# Altium PCB PCB1.PcbDoc (part 2 of 2)
Units mm, origin at the board's own origin, x right, y up, seen from the top; angles counter-clockwise.
Board outline 69.6 x 55 mm, 4 copper layers (Top Layer 1, Top Layer, Bottom Layer, Bottom Layer 1), stack 0.534 mm thick; 132 components, 100 nets, 446 pads, 41 vias.
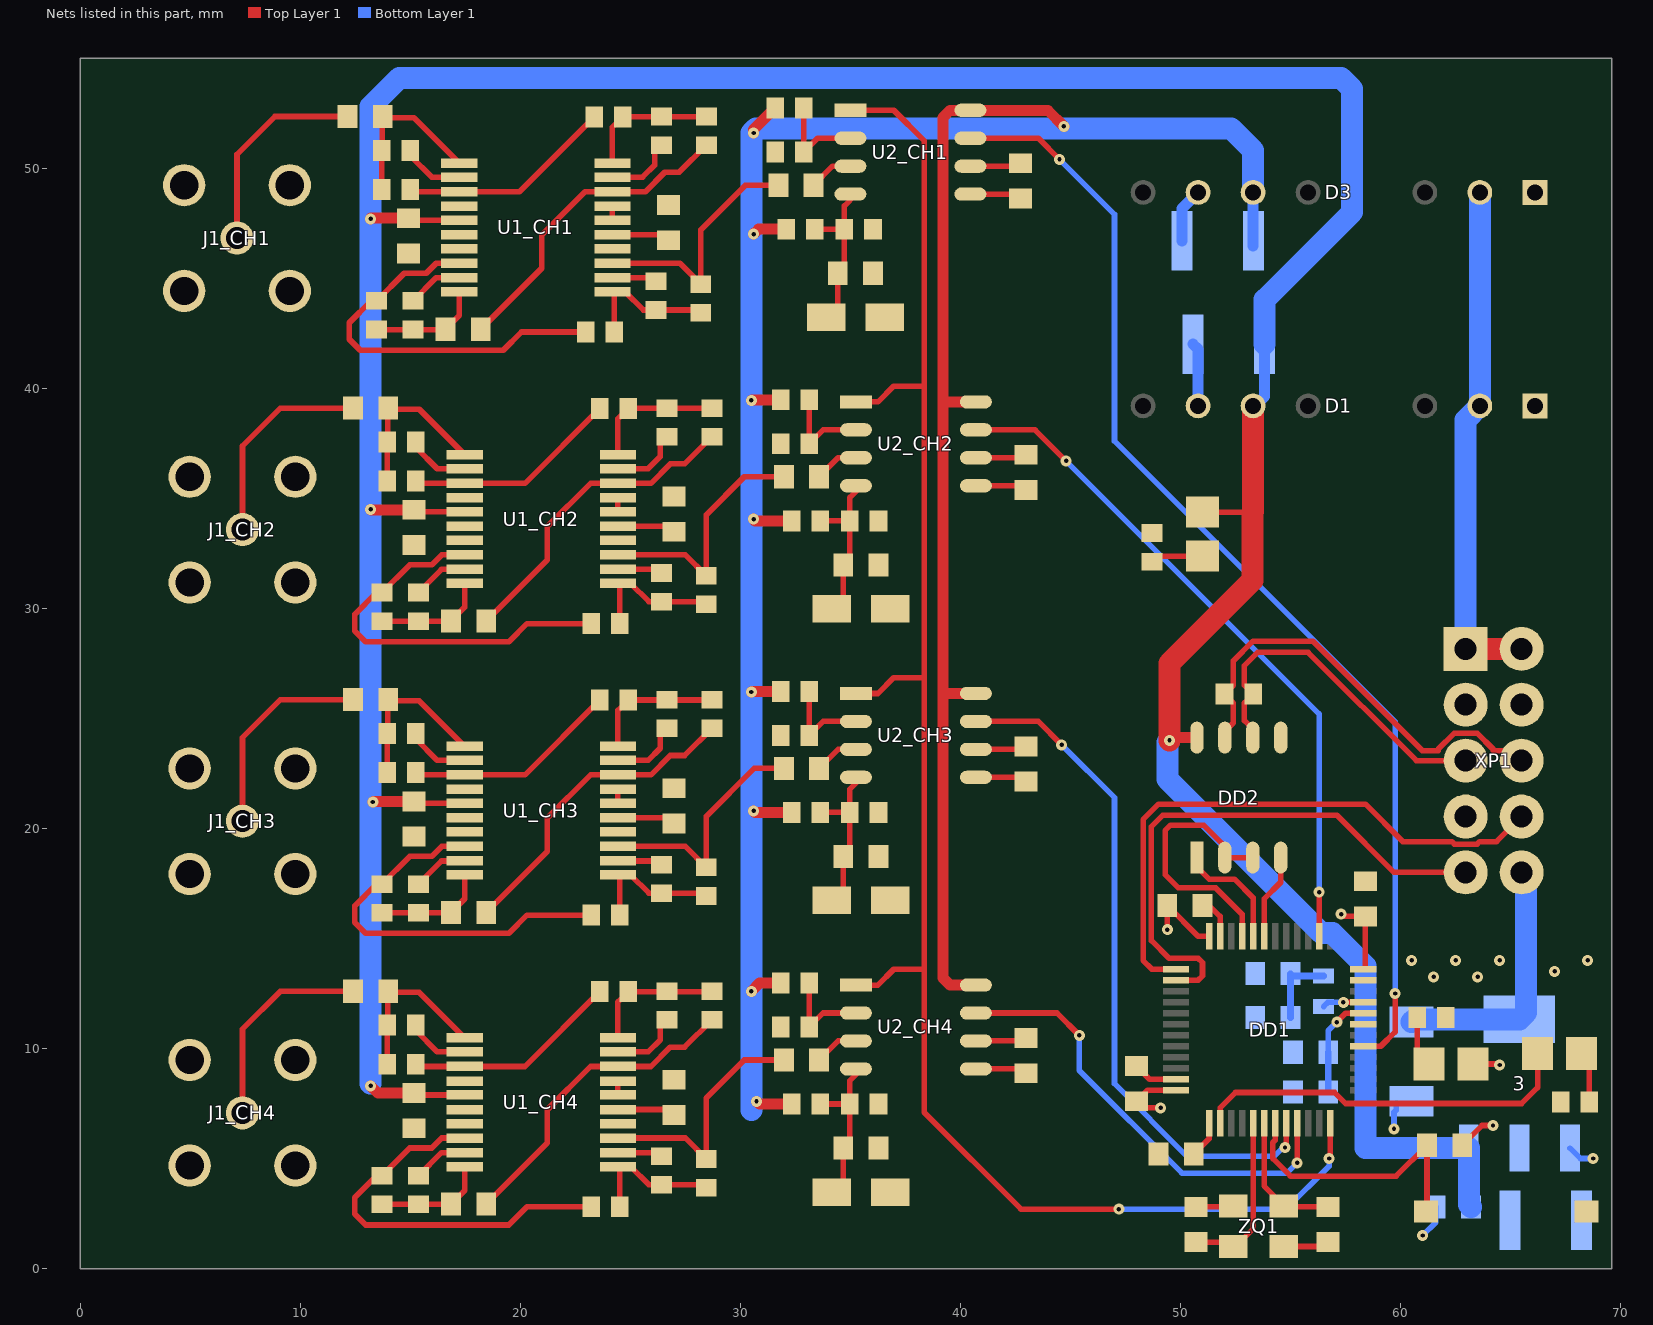
[diagram p4: the nets of this part, all layers, seen from the top]

## Part data
3: "Линейный стабилизатор напряжения", Part Number=LD1117S33CTR
C1_CH1 C1_CH2 C1_CH3 C1_CH4 C2_CH1 C2_CH2 C2_CH3 C2_CH4 C8_CH1 C8_CH2 C8_CH3 C8_CH4: library part Capacitor_1n_10_50V_X7R_0603C, "Конденсатор 0603C ёмкостью 1 н 10%, 50 В, X7R", Capacity (nF)=1, Dielectric=X7R, Tolerance=10%, Voltage (V)=50, Part Number=Capacitor_1n_10_50V_X7R_0603C
C3_CH1 C3_CH2 C3_CH3 C3_CH4 C5_CH1 C5_CH2 C5_CH3 C5_CH4 C6_CH1 C6_CH2 C6_CH3 C6_CH4 C22: library part Capacitor_0,1u_10_50V_X7R_0603C, "Конденсатор 0603C ёмкостью 0,1 мк 10%, 50 В, X7R", Capacity (nF)=100, Dielectric=X7R, Tolerance=10%, Voltage (V)=50, Part Number=Capacitor_0,1u_10_50V_X7R_0603C
C4_CH1 C4_CH2 C4_CH3 C4_CH4 C14 C19 C20: library part Capacitor_1u_10_50V_X7R_0603C, "Конденсатор 0603C ёмкостью 1 мк 10%, 50 В, X7R", Capacity (nF)=1000, Dielectric=X7R, Tolerance=10%, Voltage (V)=50, Part Number=Capacitor_1u_10_50V_X7R_0603C
C7_CH1 C7_CH2 C7_CH3 C7_CH4: library part Capacitor_100u_10_50V_TC_A, "Танталовый конденсатор", Capacity (uF)=100, Tolerance=0,1, Voltage (V)=50, Part Number=Capacitor_100u_10_50V_TC_A, Type=Tantalum
C9: library part Capacitor_4,7u_10_50V_X7R_1206C, "Конденсатор", Capacity (nF)=4700, Dielectric=X7R, Tolerance=0,1, Voltage (V)=50, Library Path2=Schematic\Capacitor.SchLib, Part Number=Capacitor_4,7u_10_50V_X7R_1206C
C10 C11 C12 C13 C17 C21: library part Capacitor_0,1u_10_50V_X7R_0603C, "Конденсатор", Capacity (nF)=100, Dielectric=X7R, Tolerance=0,1, Voltage (V)=50, Library Path2=Schematic\Capacitor.SchLib, Part Number=Capacitor_0,1u_10_50V_X7R_0603C
C15 C16 C18: library part Capacitor_10u_10_35V_X7R_1210C, "Конденсатор", Capacity (nF)=10000, Dielectric=X7R, Tolerance=0,1, Voltage (V)=35, Library Path2=Schematic\Capacitor.SchLib, Part Number=Capacitor_10u_10_35V_X7R_1210C
C23 C24: library part "0,1 мк", "Конденсатор 12п", Part Number=Capacitor
D1: library part SPBW06F-12, "Isolated Module DC DC Converter 1 Output 12V - - - 500mA 9V - 36V Input", Package="SIP-8 Mean Well", Check_prices=https://www.snapeda.com/parts/SPBW06F-12/Mean+Well/view-part/?ref=eda, MF="MEAN WELL", MP=SPBW06F-12, SnapEDA_Link=https://www.snapeda.com/parts/SPBW06F-12/Mean+Well/view-part/?ref=snap
D3: "Isolated Module DC DC Converter 1 Output 12V - - - 500mA 9V - 36V Input", Package="SIP-8 Mean Well", Check_prices=https://www.snapeda.com/parts/SPBW06F-12/Mean+Well/view-part/?ref=eda, MF="MEAN WELL", MP=SPBW06F-12, SnapEDA_Link=https://www.snapeda.com/parts/SPBW06F-12/Mean+Well/view-part/?ref=snap
DD1: "Mainstream Arm Cortex-M4 core with DSP and FPU, 170MHz with 128Kbytes of Flash memory, Math Accelerator, High Analog level integration", Manufacturer_Part_Number=stm32g4_lqfp48_t1, Built_By=EMA_Jessica, Copyright="Copyright (C) 2016 Accelerated Designs. All rights reserved", RefDes=RefDes, Type=DEV, Vendor=STMicroelectronics
DD2: "RS-485 приёмопередатчик", Part Number=MAX485CSA
HL1 HL2 HL3: "Светодиод", Color=Красный, Part Number=LED
J1_CH1 J1_CH2 J1_CH3 J1_CH4: "Straight SMA Connector", Package=None, Availability=Unavailable, MP=altium_native_batch, Price=None
L1: library part Inductance, "Катушка индуктивности", Part Number=Inductance
R1_CH1 R1_CH2 R1_CH3 R1_CH4 R2_CH1 R2_CH2 R2_CH3 R2_CH4 R3_CH1 R3_CH2 R3_CH3 R3_CH4 R4_CH1 R4_CH2 R4_CH3 R4_CH4 R5_CH1 R5_CH2 R5_CH3 R5_CH4 R6_CH1 R6_CH2 R6_CH3 R6_CH4: library part Resistor_51k_1_0603, "Резистор номиналом 51 кОм 1%", Tolerance=1%, Part Number=Resistor_51k_1_0603
R7_CH1 R7_CH2 R7_CH3 R7_CH4 R8_CH1 R8_CH2 R8_CH3 R8_CH4: library part Resistor_47k_1_0603, "Резистор номиналом 47 кОм 1%", Tolerance=1%, Part Number=Resistor_47k_1_0603
R9_CH1 R9_CH2 R9_CH3 R9_CH4 R10_CH1 R10_CH2 R10_CH3 R10_CH4: library part Resistor_91k_1_0603, "Резистор номиналом 91 кОм 1%", Tolerance=1%, Part Number=Resistor_91k_1_0603
R11_CH1 R11_CH2 R11_CH3 R11_CH4: library part Resistor_1.1k_1_0603, "Резистор номиналом 1,1 кОм 1%", Tolerance=1%, Part Number=Resistor_1.1k_1_0603
R12_CH1 R12_CH2 R12_CH3 R12_CH4: library part Resistor_12k_1_0603, "Резистор номиналом 12 кОм 1%", Tolerance=1%, Part Number=Resistor_12k_1_0603
R13_CH1 R13_CH2 R13_CH3 R13_CH4 R14_CH1 R14_CH2 R14_CH3 R14_CH4: library part Resistor_3.0k_1_0603, "Резистор номиналом 3,0 кОм 1%", Tolerance=1%, Part Number=Resistor_3.0k_1_0603
R15: library part Resistor_2.0k_1_0603, "Резистор номиналом 2,0 кОм 1%", Tolerance=1%, Part Number=Resistor_2.0k_1_0603
R16 R17: library part Resistor_1.0k_1_0603, "Резистор номиналом 1,0 кОм и точностью 1%", Tolerance=1%, Part Number=Resistor_1.0k_1_0603
R18: library part Resistor_120_1_0603, "Резистор номиналом 120 Ом 1%", Tolerance=1%, Part Number=Resistor_120_1_0603
S1: "Тактовая кнопка", Datasheet=https://cdn.promelec.ru/upload/items/2023/04/17/TSS-TD-19XA.pdf, Part Number=TSS-TD-19XA-XTR, Автор=glebmih
U1_CH1 U1_CH2 U1_CH3 U1_CH4: "Микросхема счетверённый активный полосовый фильтр", Package="SSOP-20 Linear Technology", Check_prices=https://www.snapeda.com/parts/LTC1562CG%23TR/Analog+Devices/view-part/?ref=eda, MF="Analog Devices", MP=LTC1562CG#TR, Part Number=LTC1562CG, SnapEDA_Link=https://www.snapeda.com/parts/LTC1562CG%23TR/Analog+Devices/view-part/?ref=snap
U2_CH1 U2_CH2 U2_CH3 U2_CH4: "Усилитель с регулируемым усилением", Package="SOIC-8 Analog Devices", Check_prices=https://www.snapeda.com/parts/AD603ARZ-REEL7/Analog+Devices/view-part/?ref=eda, MF="Analog Devices", MP=AD603ARZ-REEL7, Part Number=AD603ARZ-REEL-REEL7, SnapEDA_Link=https://www.snapeda.com/parts/AD603ARZ-REEL7/Analog+Devices/view-part/?ref=snap
XP1: "10-пиновый разъём с ключём", Value1=+16В, Value3=Общий, Value5=RS485_A, Value6=RS485_B, Value8=SWD, Value9=SWCLK, Value10=+3.3, Part Number=IDC-10, System=Connector, Value2=+16В, Value4=Общий, Value7=Общий
ZQ1: "Кварцевый резонатор с входом земли", Part Number=XTAL_GND

## Via types
v1: diameter 0.5, hole 0.2, Top Layer 1 to Bottom Layer 1, 41 vias

## Nets (pads, with @x,y where several pads share a name; then routed paths per layer and width w, separated by ;. In a path a pad name is that pad's centre, name@x,y a point inside that pad or via, vN(x,y) a via of type N, cw(c..) or ccw(c..) an arc to the next point about the centre after c; other vN are vias at no path point)
+3,3В: 3.2 C9.2 C11.2 C12.2 C13.2 C18.2 DD1.24 DD1.36 DD1.48 HL2.1 XP1.10 | length 23.4
  Top Layer 1 w0.254: v1(49.1,7.3) 48.3,7.3 C11.2@48,7.6 48.5,8.1 DD1.48@49.8,8.1 ; v1(49.4,15.4) C12.2@49.4,16.5 50.8,15.1 DD1.36@51.3,15.1 ; v1(57.3,16.1) 57.4,16 C13.2@58.4,16 58.4,13.7 DD1.24@58.3,13.6 ; HL2.1@63.292,9.295 64.455,9.295 v1(64.5,9.25)
  Bottom Layer 1 w1: C9.2@60.5,11.2 60.625,11.325 3.2@65.4,11.325 65.7,11.625 XP1.10@65.7,18
  other v1: 61.5,13.25 63.5,13.25 67,13.5 60.5,14 62.5,14 64.5,14 68.5,14
+5В: 3.3 C3_CH1.2 C3_CH2.2 C3_CH3.2 C3_CH4.2 C10.2 C16.2 D1.6 DD2.8 HL1.1 U1_CH1.5 U1_CH2.5 U1_CH3.5 U1_CH4.5 | length 173.5
  Top Layer 1 w0.254: C3_CH1.2@14.927,47.727 15.018,47.636 U1_CH1.5@17.227,47.636 ; C3_CH4.2@15.177,7.977 15.268,7.886 U1_CH4.5@17.477,7.886 ; C3_CH3.2@15.177,21.227 15.268,21.136 U1_CH3.5@17.477,21.136 ; C3_CH2.2@15.177,34.477 15.268,34.386 U1_CH2.5@17.477,34.386 ; HL1.1@51,34.373 53.273,34.373 53.4,34.5
  Top Layer 1 w0.5: v1(13.2,8.3) 13.523,7.977 C3_CH4.2@15.177,7.977 ; v1(13.2,34.5) 13.223,34.477 C3_CH2.2@15.177,34.477 ; v1(13.2,47.7) 13.227,47.727 C3_CH1.2@14.927,47.727 ; v1(13.3,21.2) 13.327,21.227 C3_CH3.2@15.177,21.227 ; v1(49.5,24) 49.625,24.125 DD2.8@50.745,24.125
  Top Layer 1 w1: v1(49.5,24) 49.5,27.5 53.273,31.273 53.273,34.373 ; 53.3,34.4 D1.6@53.3,39.2
  Bottom Layer 1 w0.5: D1.6@53.4,39.2 53.825,39.625 C16.2@53.825,42
  Bottom Layer 1 w1: v1@13.2,8.4 v1(13.2,34.5) v1(13.2,47.7) 13.2,52.8 14.5,54.1 57.3,54.1 57.8,53.6 57.8,48 53.825,44.025 C16.2@53.825,42 ; v1(49.5,24) 49.4,23.9 49.4,22.248 56.4,15.248 56.9,15.248 58.4,13.748 58.4,5.475 3.3@63.1,5.475 63.1,2.9 C10.2@63.2,2.8
+12В: C15.2 D3.6 R12_CH1.2 R12_CH2.2 R12_CH3.2 R12_CH4.2 R14_CH1.2 R14_CH2.2 R14_CH3.2 R14_CH4.2 U2_CH1.8 U2_CH2.8 U2_CH3.8 U2_CH4.8 | length 134.2
  Top Layer 1 w0.5: v1(30.5,12.6) 30.877,12.977 R12_CH4.2@31.827,12.977 ; v1(30.5,26.2) 30.527,26.227 R12_CH3.2@31.827,26.227 ; v1(30.5,39.45) 30.527,39.477 R12_CH2.2@31.827,39.477 ; v1(30.6,20.8) 30.673,20.727 R14_CH3.2@32.327,20.727 ; v1(30.6,34.05) 30.673,33.977 R14_CH2.2@32.327,33.977 ; v1(30.6,51.6) 30.6,51.75 R12_CH1.2@31.577,52.727 ; v1(30.604,47.004) 30.827,47.227 R14_CH1.2@32.077,47.227 ; v1(30.735,7.6) 30.76,7.575 30.859,7.477 R14_CH4.2@32.327,7.477 ; U2_CH4.8@40.702,12.882 39.518,12.882 39.2,13.2 39.2,26.3 ; U2_CH3.8@40.702,26.132 39.368,26.132 39.2,26.3 ; U2_CH2.8@40.702,39.382 39.218,39.382 39.2,39.4 ; v1(44.7,51.9) 43.968,52.632 U2_CH1.8@40.452,52.632 39.532,52.632 39.2,52.3 39.2,39.4 ; 39.2,26.3 39.2,39.4
  Bottom Layer 1 w0.5: C15.2@53.3,46.459 D3.6@53.3,48.9
  Bottom Layer 1 w1: 30.5,7.2 v1(30.5,26.2) 30.5,47.004 30.5,51.6 30.7,51.8 52.3,51.8 53.3,50.8 D3.6@53.3,48.9
+16В: D1.2 D3.2 XP1.1 XP1.2 | length 23.5
  Top Layer 1 w1: XP1.1@63.06,28.16 XP1.2@65.5,28.16 XP1.2@65.7,28.16
  Bottom Layer 1 w1: XP1.1@62.96,28.16 62.96,38.56 D1.2@63.6,39.2 ; D1.2@63.6,39.3 D3.2@63.6,48.9
AGND: 3.1 C3_CH1.1 C3_CH2.1 C3_CH3.1 C3_CH4.1 C4_CH1.1 C4_CH2.1 C4_CH3.1 C4_CH4.1 C6_CH1.2 C6_CH2.2 C6_CH3.2 C6_CH4.2 C7_CH1.2 C7_CH2.2 C7_CH3.2 C7_CH4.2 C8_CH1.1 C8_CH2.1 C8_CH3.1 C8_CH4.1 C9.1 C10.1 C11.1 C12.1 C13.1 C14.1 C15.1 C16.1 C17.1 C18.1 C19.1 C20.1 C21.1 C22.1 C23.1 C24.1 D1.1 D1.7 D3.1 D3.7 DD1.19 DD1.23 DD1.35 DD1.47 DD2.5 J1_CH1.G1 J1_CH1.G2 J1_CH1.G3 J1_CH1.G4 J1_CH2.G1 J1_CH2.G2 J1_CH2.G3 J1_CH2.G4 J1_CH3.G1 J1_CH3.G2 J1_CH3.G3 J1_CH3.G4 J1_CH4.G1 J1_CH4.G2 J1_CH4.G3 J1_CH4.G4 R11_CH1.1 R11_CH2.1 R11_CH3.1 R11_CH4.1 R13_CH1.1 R13_CH2.1 R13_CH3.1 R13_CH4.1 R15.1 R16.1 R17.1 S1.1 U1_CH1.4 U1_CH1.6 U1_CH1.7 U1_CH1.14 U1_CH1.16 U1_CH1.17 U1_CH2.4 U1_CH2.6 U1_CH2.7 U1_CH2.14 U1_CH2.16 U1_CH2.17 U1_CH3.4 U1_CH3.6 U1_CH3.7 U1_CH3.14 U1_CH3.16 U1_CH3.17 U1_CH4.4 U1_CH4.6 U1_CH4.7 U1_CH4.14 U1_CH4.16 U1_CH4.17 U2_CH1.6 U2_CH2.6 U2_CH3.6 U2_CH4.6 XP1.3 XP1.4 XP1.7 ZQ1.3 | length 31.3
  Top Layer 1 w0.254: U1_CH1.16@24.186,47.636 U1_CH1.17@24.186,48.271 ; U1_CH4.16@24.436,7.886 U1_CH4.17@24.436,8.521 ; U1_CH3.16@24.436,21.136 U1_CH3.17@24.436,21.771 ; U1_CH2.16@24.436,34.386 U1_CH2.17@24.436,35.021 ; U2_CH1.6@40.452,50.092 42.592,50.092 C8_CH1.1@42.727,50.227 ; U2_CH4.6@40.702,10.342 42.842,10.342 C8_CH4.1@42.977,10.477 ; U2_CH3.6@40.702,23.592 42.842,23.592 C8_CH3.1@42.977,23.727 ; U2_CH2.6@40.702,36.842 42.842,36.842 C8_CH2.1@42.977,36.977 ; C11.1@48,9.2 48.6,8.6 DD1.47@49.8,8.6 ; C12.1@50.7,16.2 C12.1@51,16.5 ; C24.1@50.8,2.8 52.45,2.8 ZQ1.3@52.5,2.85 ; C12.1@51.3,16.1 51.3,16.5 51.8,16 DD1.35@51.8,15.1 ; ZQ1.3@54.8,1 56.6,1 C23.1@56.8,1.2 ; C22.1@62.8,5.6 63.7,6.5 v1(64.2,6.5)
  Bottom Layer 1 w0.254: v1(59.7,6.35) 59.7,7.1 59.8,7.2 C9.1@59.8,7.5 ; v1(61,1.5) 61.6,2.1 C10.1@61.6,2.8 ; 3.1@67.7,5.475 68.175,5 v1(68.75,5)
  Bottom Layer 1 w0.5: C15.1@50.075,46.7 50.075,48.175 D3.7@50.8,48.9 ; C16.1@50.575,42 50.8,41.775 D1.7@50.8,39.2
CH1: DD1.17 U2_CH1.7 | length 52.2
  Top Layer 1 w0.254: U2_CH1.7@40.452,51.362 43.538,51.362 v1(44.5,50.4) v1@44.462,50.362 ; DD1.17@58.3,10.1 59.1,10.1 59.75,10.75 v1(59.75,12.5)
  Bottom Layer 1 w0.254: v1(44.5,50.4) 47,47.9 47,37.6 59.75,24.85 v1(59.75,12.5)
CH2: DD1.26 U2_CH2.7 | length 31
  Top Layer 1 w0.254: U2_CH2.7@40.702,38.112 43.388,38.112 v1(44.8,36.7) ; DD1.26@56.3,15.1 v1(56.3,17.1)
  Bottom Layer 1 w0.254: v1(44.8,36.7) 56.3,25.2 v1(56.3,17.1)
CH3: DD1.8 U2_CH3.7 | length 31.1
  Top Layer 1 w0.254: U2_CH3.7@40.702,24.862 43.538,24.862 v1(44.6,23.8) ; v1(54.75,5.5) 54.8,5.55 DD1.8@54.8,6.6
  Bottom Layer 1 w0.254: v1(44.6,23.8) 47,21.4 47,8.4 50.3,5.1 54.25,5.1 54.65,5.5 v1(54.75,5.5)
CH4: DD1.9 U2_CH4.7 | length 20.5
  Top Layer 1 w0.254: U2_CH4.7@40.702,11.612 44.388,11.612 v1(45.4,10.6) ; v1(55.3,4.8) 55.3,5.269 55.302,5.271 55.302,5.729 55.3,5.731 DD1.9@55.3,6.6
  Bottom Layer 1 w0.254: v1(45.4,10.6) 45.4,9 50.067,4.333 54.833,4.333 v1(55.3,4.8)
Gain: DD1.12 U2_CH1.1 U2_CH2.1 U2_CH3.1 U2_CH4.1 | length 82.3
  Top Layer 1 w0.254: U2_CH4.1@35.252,12.882 36.252,12.882 36.97,13.6 38.35,13.6 ; U2_CH3.1@35.252,26.132 36.252,26.132 36.97,26.85 38.35,26.85 ; U2_CH2.1@35.252,39.382 36.252,39.382 36.97,40.1 38.35,40.1 ; 36.002,52.632 U2_CH1.1@35.002,52.632 36.968,52.632 38.35,51.25 38.35,40.1 ; v1(47.2,2.7) 42.75,2.7 38.35,7.1 38.35,13.6 ; v1(56.75,5) 56.8,5.05 DD1.12@56.8,6.6 ; 38.35,13.6 38.35,26.85 ; 38.35,26.85 38.35,40.1
  Bottom Layer 1 w0.254: v1(47.2,2.7) 54.8,2.7 56.75,4.65 v1(56.75,5)
LED_ERROR: DD1.2 HL3.1 | length 17.5
  Top Layer 1 w0.254: DD1.2@51.8,6.6 51.8,7.3 52.5,8 57,8 57.5,7.5 65.5,7.5 66.226,8.226 HL3.1@66.226,9.768
NetC1_CH1_1: C1_CH1.1 J1_CH1.1 | length 9.5
  Top Layer 1 w0.254: J1_CH1.1@7.127,46.827 7.127,50.627 8.85,52.35 C1_CH1.1@12.092,52.35
NetC1_CH1_2: C1_CH1.2 R1_CH1.1 R3_CH1.1 U1_CH1.1 | length 7.6
  Top Layer 1 w0.254: R1_CH1.1@13.707,49.033 R3_CH1.1@13.707,50.811 13.722,50.826 13.722,52.297 15.157,52.297 U1_CH1.1@17.227,50.227
NetC1_CH2_1: C1_CH2.1 J1_CH2.1 | length 9.5
  Top Layer 1 w0.254: J1_CH2.1@7.377,33.577 7.377,37.377 9.1,39.1 C1_CH2.1@12.342,39.1
NetC1_CH2_2: C1_CH2.2 R1_CH2.1 R3_CH2.1 U1_CH2.1 | length 7.6
  Top Layer 1 w0.254: R1_CH2.1@13.957,35.783 R3_CH2.1@13.957,37.561 13.972,37.576 13.972,39.047 15.407,39.047 U1_CH2.1@17.477,36.977
NetC1_CH3_1: C1_CH3.1 J1_CH3.1 | length 9.5
  Top Layer 1 w0.254: J1_CH3.1@7.377,20.327 7.377,24.127 9.1,25.85 C1_CH3.1@12.342,25.85
NetC1_CH3_2: C1_CH3.2 R1_CH3.1 R3_CH3.1 U1_CH3.1 | length 7.6
  Top Layer 1 w0.254: R1_CH3.1@13.957,22.533 R3_CH3.1@13.957,24.311 13.972,24.326 13.972,25.797 15.407,25.797 U1_CH3.1@17.477,23.727
NetC1_CH4_1: C1_CH4.1 J1_CH4.1 | length 9.5
  Top Layer 1 w0.254: J1_CH4.1@7.377,7.077 7.377,10.877 9.1,12.6 C1_CH4.1@12.342,12.6
NetC1_CH4_2: C1_CH4.2 R1_CH4.1 R3_CH4.1 U1_CH4.1 | length 7.6
  Top Layer 1 w0.254: R1_CH4.1@13.957,9.283 R3_CH4.1@13.957,11.061 13.972,11.076 13.972,12.547 15.407,12.547 U1_CH4.1@17.477,10.477
NetC2_CH1_1: C2_CH1.1 R7_CH1.1 U1_CH1.18 | length 14.6
  Top Layer 1 w0.254: C2_CH1.1@18.205,42.683 20.977,45.455 20.977,46.966 22.942,48.931 U1_CH1.18@24.186,48.931 25.681,48.931 26.563,49.813 27.217,49.813 R7_CH1.1@28.454,51.05
NetC2_CH1_2: C2_CH1.2 R2_CH1.1 R4_CH1.1 U1_CH1.10 | length 5.1
  Top Layer 1 w0.254: R4_CH1.1@13.468,42.668 R2_CH1.1@15.119,42.668 16.59,42.668 C2_CH1.2@16.605,42.683 17.227,43.305 U1_CH1.10@17.227,44.385
NetC2_CH2_1: C2_CH2.1 R7_CH2.1 U1_CH2.18 | length 14.6
  Top Layer 1 w0.254: C2_CH2.1@18.455,29.433 21.227,32.205 21.227,33.716 23.192,35.681 U1_CH2.18@24.436,35.681 25.931,35.681 26.813,36.563 27.467,36.563 R7_CH2.1@28.704,37.8
NetC2_CH2_2: C2_CH2.2 R2_CH2.1 R4_CH2.1 U1_CH2.10 | length 5.1
  Top Layer 1 w0.254: R4_CH2.1@13.718,29.418 R2_CH2.1@15.369,29.418 16.84,29.418 C2_CH2.2@16.855,29.433 17.477,30.055 U1_CH2.10@17.477,31.135
NetC2_CH3_1: C2_CH3.1 R7_CH3.1 U1_CH3.18 | length 14.6
  Top Layer 1 w0.254: C2_CH3.1@18.455,16.183 21.227,18.955 21.227,20.466 23.192,22.431 U1_CH3.18@24.436,22.431 25.931,22.431 26.813,23.313 27.467,23.313 R7_CH3.1@28.704,24.55
NetC2_CH3_2: C2_CH3.2 R2_CH3.1 R4_CH3.1 U1_CH3.10 | length 5.1
  Top Layer 1 w0.254: R4_CH3.1@13.718,16.168 R2_CH3.1@15.369,16.168 16.84,16.168 C2_CH3.2@16.855,16.183 17.477,16.805 U1_CH3.10@17.477,17.885
NetC2_CH4_1: C2_CH4.1 R7_CH4.1 U1_CH4.18 | length 14.6
  Top Layer 1 w0.254: C2_CH4.1@18.455,2.933 21.227,5.705 21.227,7.216 23.192,9.181 U1_CH4.18@24.436,9.181 25.931,9.181 26.813,10.063 27.467,10.063 R7_CH4.1@28.704,11.3
NetC2_CH4_2: C2_CH4.2 R2_CH4.1 R4_CH4.1 U1_CH4.10 | length 5.1
  Top Layer 1 w0.254: R4_CH4.1@13.718,2.918 R2_CH4.1@15.369,2.918 16.84,2.918 C2_CH4.2@16.855,2.933 17.477,3.555 U1_CH4.10@17.477,4.635
NetC4_CH1_2: C4_CH1.2 U1_CH1.15 | length 2.6
  Top Layer 1 w0.254: U1_CH1.15@24.186,46.976 26.478,46.976 C4_CH1.2@26.727,46.727
NetC4_CH2_2: C4_CH2.2 U1_CH2.15 | length 2.6
  Top Layer 1 w0.254: U1_CH2.15@24.436,33.726 26.728,33.726 C4_CH2.2@26.977,33.477
NetC4_CH3_2: C4_CH3.2 U1_CH3.15 | length 2.6
  Top Layer 1 w0.254: U1_CH3.15@24.436,20.476 26.728,20.476 C4_CH3.2@26.977,20.227
NetC4_CH4_2: C4_CH4.2 U1_CH4.15 | length 2.6
  Top Layer 1 w0.254: U1_CH4.15@24.436,7.226 26.728,7.226 C4_CH4.2@26.977,6.977
NetC5_CH1_1: C5_CH1.1 R8_CH1.1 U1_CH1.13 | length 11.2
  Top Layer 1 w0.254: U1_CH1.13@24.186,45.68 27.249,45.68 R8_CH1.1@28.2,44.73 28.2,47.2 30.227,49.227 C5_CH1.1@31.727,49.227
NetC5_CH1_2: C5_CH1.2 U2_CH1.3 | length 2.3
  Top Layer 1 w0.254: C5_CH1.2@33.327,49.227 34.192,50.092 U2_CH1.3@35.263,50.092
NetC5_CH2_1: C5_CH2.1 R8_CH2.1 U1_CH2.13 | length 11.4
  Top Layer 1 w0.254: U1_CH2.13@24.436,32.43 27.499,32.43 R8_CH2.1@28.45,31.48 28.45,34.25 30.177,35.977 C5_CH2.1@31.977,35.977
NetC5_CH2_2: C5_CH2.2 U2_CH2.3 | length 2.3
  Top Layer 1 w0.254: C5_CH2.2@33.577,35.977 34.442,36.842 U2_CH2.3@35.513,36.842
NetC5_CH3_1: C5_CH3.1 R8_CH3.1 U1_CH3.13 | length 11.2
  Top Layer 1 w0.254: U1_CH3.13@24.436,19.18 27.499,19.18 R8_CH3.1@28.45,18.23 28.45,20.55 30.627,22.727 C5_CH3.1@31.977,22.727
NetC5_CH3_2: C5_CH3.2 U2_CH3.3 | length 2.3
  Top Layer 1 w0.254: C5_CH3.2@33.577,22.727 34.442,23.592 U2_CH3.3@35.513,23.592
NetC5_CH4_1: C5_CH4.1 R8_CH4.1 U1_CH4.13 | length 11.4
  Top Layer 1 w0.254: U1_CH4.13@24.436,5.93 27.499,5.93 R8_CH4.1@28.45,4.98 28.45,7.75 30.177,9.477 C5_CH4.1@31.977,9.477
NetC5_CH4_2: C5_CH4.2 U2_CH4.3 | length 2.3
  Top Layer 1 w0.254: C5_CH4.2@33.577,9.477 34.442,10.342 U2_CH4.3@35.513,10.342
NetC6_CH1_1: C6_CH1.1 C7_CH1.1 R13_CH1.2 R14_CH1.1 U2_CH1.4 | length 7.5
  Top Layer 1 w0.254: R14_CH1.1@33.377,47.227 R13_CH1.2@34.727,47.227 ; C7_CH1.1@33.902,43.227 34.427,43.752 C6_CH1.1@34.427,45.227 34.727,45.527 R13_CH1.2@34.727,47.227 ; U2_CH1.4@35.263,48.822 34.727,48.286 R13_CH1.2@34.727,47.227
NetC6_CH2_1: C6_CH2.1 C7_CH2.1 R13_CH2.2 R14_CH2.1 U2_CH2.4 | length 7.5
  Top Layer 1 w0.254: R14_CH2.1@33.627,33.977 R13_CH2.2@34.977,33.977 ; C7_CH2.1@34.152,29.977 34.677,30.502 C6_CH2.1@34.677,31.977 34.977,32.277 R13_CH2.2@34.977,33.977 ; U2_CH2.4@35.513,35.572 34.977,35.036 R13_CH2.2@34.977,33.977
NetC6_CH3_1: C6_CH3.1 C7_CH3.1 R13_CH3.2 R14_CH3.1 U2_CH3.4 | length 7.5
  Top Layer 1 w0.254: R14_CH3.1@33.627,20.727 R13_CH3.2@34.977,20.727 ; C7_CH3.1@34.152,16.727 34.677,17.252 C6_CH3.1@34.677,18.727 34.977,19.027 R13_CH3.2@34.977,20.727 ; U2_CH3.4@35.513,22.322 34.977,21.786 R13_CH3.2@34.977,20.727
NetC6_CH4_1: C6_CH4.1 C7_CH4.1 R13_CH4.2 R14_CH4.1 U2_CH4.4 | length 7.5
  Top Layer 1 w0.254: R14_CH4.1@33.627,7.477 R13_CH4.2@34.977,7.477 ; C7_CH4.1@34.152,3.477 34.677,4.002 C6_CH4.1@34.677,5.477 34.977,5.777 R13_CH4.2@34.977,7.477 ; U2_CH4.4@35.513,9.072 34.977,8.536 R13_CH4.2@34.977,7.477
NetC8_CH1_2: C8_CH1.2 U2_CH1.5 | length 2.6
  Top Layer 1 w0.254: U2_CH1.5@40.191,48.822 42.532,48.822 C8_CH1.2@42.727,48.627
NetC8_CH2_2: C8_CH2.2 U2_CH2.5 | length 2.6
  Top Layer 1 w0.254: U2_CH2.5@40.441,35.572 42.782,35.572 C8_CH2.2@42.977,35.377
NetC8_CH3_2: C8_CH3.2 U2_CH3.5 | length 2.6
  Top Layer 1 w0.254: U2_CH3.5@40.441,22.322 42.782,22.322 C8_CH3.2@42.977,22.127
NetC8_CH4_2: C8_CH4.2 U2_CH4.5 | length 2.6
  Top Layer 1 w0.254: U2_CH4.5@40.441,9.072 42.782,9.072 C8_CH4.2@42.977,8.877
NetC14_2: C14.2 C17.2 L1.1 | length 3.5
  Bottom Layer 1 w0.254: C17.2@55,13.4 C17.2@55.105,13.295
  Bottom Layer 1 w0.3: C14.2@55,11.4 C17.2@55,13.4 ; C17.2@55.105,13.295 L1.1@56.5,13.295
NetC19_2: C19.2 DD1.1 | length 1.7
  Top Layer 1 w0.254: C19.2@50.6,5.2 51.3,5.9 DD1.1@51.3,6.6
NetC20_2: C20.2 C21.2 DD1.20 | length 4.7
  Top Layer 1 w0.254: v1(57.1,11.2) 57.5,11.6 DD1.20@58.3,11.6
  Bottom Layer 1 w0.254: C20.2@56.714,9.828 56.714,10.814 v1(57.1,11.2)
  Bottom Layer 1 w0.3: C21.2@56.714,8.028 C20.2@56.714,9.828
NetC22_2: C22.2 DD1.7 S1.2 | length 12.6
  Top Layer 1 w0.254: DD1.7@54.3,6.6 54.3,5.831 54.198,5.729 54.198,5.002 55,4.2 59.8,4.2 C22.2@61.2,5.6 61.2,2.65 S1.2@61.15,2.6
NetC23_2: C23.2 DD1.6 ZQ1.1 | length 6.1
  Top Layer 1 w0.254: DD1.6@53.8,6.6 53.8,5.136 53.8,3.75 ZQ1.1@54.7,2.85 ; ZQ1.1@54.8,2.85 54.85,2.8 C23.2@56.8,2.8
NetC24_2: C24.2 DD1.5 ZQ1.2 | length 7.7
  Top Layer 1 w0.254: C24.2@50.8,1.2 52.3,1.2 52.5,1 53.3,1.8 53.3,2.219 53.302,2.221 53.302,3.479 53.3,3.481 53.3,5.1 DD1.5@53.3,6.6
NetDD1_21: DD1.21 L1.2 | length 1.9
  Top Layer 1 w0.254: v1(57.4,12.1) DD1.21@58.3,12.1
  Bottom Layer 1 w0.254: L1.2@56.5,11.905 56.695,12.1 v1(57.4,12.1)
NetHL1_2: HL1.2 R15.2 | length 2.4
  Top Layer 1 w0.254: R15.2@48.7,32.123 48.95,32.373 HL1.2@51,32.373
NetHL2_2: HL2.2 R16.2 | length 2.3
  Top Layer 1 w0.254: R16.2@60.75,11.4 60.75,9.837 HL2.2@61.292,9.295
NetHL3_2: HL3.2 R17.2 | length 2.3
  Top Layer 1 w0.254: HL3.2@68.226,9.768 68.576,9.418 R17.2@68.576,7.568
NetR1_CH1_2: R1_CH1.2 R5_CH1.1 U1_CH1.3 | length 9.8
  Top Layer 1 w0.254: R1_CH1.2@15.007,49.033 15.108,48.931 U1_CH1.3@17.227,48.931 19.955,48.931 R5_CH1.1@23.359,52.335
NetR1_CH2_2: R1_CH2.2 R5_CH2.1 U1_CH2.3 | length 9.8
  Top Layer 1 w0.254: R1_CH2.2@15.257,35.783 15.358,35.681 U1_CH2.3@17.477,35.681 20.205,35.681 R5_CH2.1@23.609,39.085
NetR1_CH3_2: R1_CH3.2 R5_CH3.1 U1_CH3.3 | length 9.8
  Top Layer 1 w0.254: R1_CH3.2@15.257,22.533 15.358,22.431 U1_CH3.3@17.477,22.431 20.205,22.431 R5_CH3.1@23.609,25.835
NetR1_CH4_2: R1_CH4.2 R5_CH4.1 U1_CH4.3 | length 9.8
  Top Layer 1 w0.254: R1_CH4.2@15.257,9.283 15.358,9.181 U1_CH4.3@17.477,9.181 20.205,9.181 R5_CH4.1@23.609,12.585
NetR2_CH1_2: R2_CH1.2 U1_CH1.9 | length 2.5
  Top Layer 1 w0.254: R2_CH1.2@15.119,43.968 16.17,45.02 U1_CH1.9@17.227,45.02
NetR2_CH2_2: R2_CH2.2 U1_CH2.9 | length 2.5
  Top Layer 1 w0.254: R2_CH2.2@15.369,30.718 16.42,31.77 U1_CH2.9@17.477,31.77
NetR2_CH3_2: R2_CH3.2 U1_CH3.9 | length 2.5
  Top Layer 1 w0.254: R2_CH3.2@15.369,17.468 16.42,18.52 U1_CH3.9@17.477,18.52
NetR2_CH4_2: R2_CH4.2 U1_CH4.9 | length 2.5
  Top Layer 1 w0.254: R2_CH4.2@15.369,4.218 16.42,5.27 U1_CH4.9@17.477,5.27
NetR3_CH1_2: R3_CH1.2 U1_CH1.2 | length 2.9
  Top Layer 1 w0.254: R3_CH1.2@15.007,50.811 15.007,50.562 15.977,49.592 U1_CH1.2@17.227,49.592
NetR3_CH2_2: R3_CH2.2 U1_CH2.2 | length 2.9
  Top Layer 1 w0.254: R3_CH2.2@15.257,37.561 15.257,37.312 16.227,36.342 U1_CH2.2@17.477,36.342
NetR3_CH3_2: R3_CH3.2 U1_CH3.2 | length 2.9
  Top Layer 1 w0.254: R3_CH3.2@15.257,24.311 15.257,24.062 16.227,23.092 U1_CH3.2@17.477,23.092
NetR3_CH4_2: R3_CH4.2 U1_CH4.2 | length 2.9
  Top Layer 1 w0.254: R3_CH4.2@15.257,11.061 15.257,10.812 16.227,9.842 U1_CH4.2@17.477,9.842
NetR4_CH1_2: R4_CH1.2 R6_CH1.1 U1_CH1.8 | length 18.2
  Top Layer 1 w0.254: U1_CH1.8@17.28,45.627 U1_CH1.8@17.227,45.68 16.18,45.68 15.727,45.227 14.726,45.227 R4_CH1.2@13.468,43.968 13.218,43.968 12.227,42.977 12.227,42.227 12.727,41.727 19.227,41.727 20.056,42.556 R6_CH1.1@22.978,42.556
NetR4_CH2_2: R4_CH2.2 R6_CH2.1 U1_CH2.8 | length 18.2
  Top Layer 1 w0.254: U1_CH2.8@17.53,32.377 U1_CH2.8@17.477,32.43 16.43,32.43 15.977,31.977 14.976,31.977 R4_CH2.2@13.718,30.718 13.468,30.718 12.477,29.727 12.477,28.977 12.977,28.477 19.477,28.477 20.306,29.306 R6_CH2.1@23.228,29.306
NetR4_CH3_2: R4_CH3.2 R6_CH3.1 U1_CH3.8 | length 18.2
  Top Layer 1 w0.254: U1_CH3.8@17.53,19.127 U1_CH3.8@17.477,19.18 16.43,19.18 15.977,18.727 14.976,18.727 R4_CH3.2@13.718,17.468 13.468,17.468 12.477,16.477 12.477,15.727 12.977,15.227 19.477,15.227 20.306,16.056 R6_CH3.1@23.228,16.056
NetR4_CH4_2: R4_CH4.2 R6_CH4.1 U1_CH4.8 | length 18.2
  Top Layer 1 w0.254: U1_CH4.8@17.53,5.877 U1_CH4.8@17.477,5.93 16.43,5.93 15.977,5.477 14.976,5.477 R4_CH4.2@13.718,4.218 13.468,4.218 12.477,3.227 12.477,2.477 12.977,1.977 19.477,1.977 20.306,2.806 R6_CH4.1@23.228,2.806
NetR5_CH1_2: R5_CH1.2 R7_CH1.2 R9_CH1.2 U1_CH1.20 | length 6.1
  Top Layer 1 w0.254: U1_CH1.20@24.186,50.227 24.186,51.863 R5_CH1.2@24.659,52.335 26.422,52.335 28.439,52.335 R7_CH1.2@28.454,52.35
NetR5_CH2_2: R5_CH2.2 R7_CH2.2 R9_CH2.2 U1_CH2.20 | length 6.1
  Top Layer 1 w0.254: U1_CH2.20@24.436,36.977 24.436,38.613 R5_CH2.2@24.909,39.085 26.672,39.085 28.689,39.085 R7_CH2.2@28.704,39.1
NetR5_CH3_2: R5_CH3.2 R7_CH3.2 R9_CH3.2 U1_CH3.20 | length 6.1
  Top Layer 1 w0.254: U1_CH3.20@24.436,23.727 24.436,25.363 R5_CH3.2@24.909,25.835 26.672,25.835 28.689,25.835 R7_CH3.2@28.704,25.85
NetR5_CH4_2: R5_CH4.2 R7_CH4.2 R9_CH4.2 U1_CH4.20 | length 6.1
  Top Layer 1 w0.254: U1_CH4.20@24.436,10.477 24.436,12.113 R5_CH4.2@24.909,12.585 26.672,12.585 28.689,12.585 R7_CH4.2@28.704,12.6
NetR6_CH1_2: R6_CH1.2 R8_CH1.2 R10_CH1.2 U1_CH1.11 | length 6.3
  Top Layer 1 w0.254: R6_CH1.2@24.278,42.556 24.278,44.294 U1_CH1.11@24.186,44.385 24.763,44.385 25.591,43.557 R10_CH1.2@26.168,43.557 28.073,43.557 R8_CH1.2@28.2,43.43
NetR6_CH2_2: R6_CH2.2 R8_CH2.2 R10_CH2.2 U1_CH2.11 | length 6.3
  Top Layer 1 w0.254: R6_CH2.2@24.528,29.306 24.528,31.044 U1_CH2.11@24.436,31.135 25.013,31.135 25.841,30.307 R10_CH2.2@26.418,30.307 28.323,30.307 R8_CH2.2@28.45,30.18
NetR6_CH3_2: R6_CH3.2 R8_CH3.2 R10_CH3.2 U1_CH3.11 | length 6.3
  Top Layer 1 w0.254: R6_CH3.2@24.528,16.056 24.528,17.794 U1_CH3.11@24.436,17.885 25.013,17.885 25.841,17.057 R10_CH3.2@26.418,17.057 28.323,17.057 R8_CH3.2@28.45,16.93
NetR6_CH4_2: R6_CH4.2 R8_CH4.2 R10_CH4.2 U1_CH4.11 | length 6.3
  Top Layer 1 w0.254: R6_CH4.2@24.528,2.806 24.528,4.544 U1_CH4.11@24.436,4.635 25.013,4.635 25.841,3.807 R10_CH4.2@26.418,3.807 28.323,3.807 R8_CH4.2@28.45,3.68
NetR9_CH1_1: R9_CH1.1 U1_CH1.19 | length 3.2
  Top Layer 1 w0.254: U1_CH1.19@24.186,49.592 25.56,49.592 26.11,50.142 26.11,50.777 26.383,51.05 R9_CH1.1@26.422,51.05
NetR9_CH2_1: R9_CH2.1 U1_CH2.19 | length 3.2
  Top Layer 1 w0.254: U1_CH2.19@24.436,36.342 25.81,36.342 26.36,36.892 26.36,37.527 26.633,37.8 R9_CH2.1@26.672,37.8
NetR9_CH3_1: R9_CH3.1 U1_CH3.19 | length 3.2
  Top Layer 1 w0.254: U1_CH3.19@24.436,23.092 25.81,23.092 26.36,23.642 26.36,24.277 26.633,24.55 R9_CH3.1@26.672,24.55
NetR9_CH4_1: R9_CH4.1 U1_CH4.19 | length 3.2
  Top Layer 1 w0.254: U1_CH4.19@24.436,9.842 25.81,9.842 26.36,10.392 26.36,11.027 26.633,11.3 R9_CH4.1@26.672,11.3
NetR10_CH1_1: R10_CH1.1 U1_CH1.12 | length 2
  Top Layer 1 w0.254: U1_CH1.12@24.186,45.02 26.005,45.02 R10_CH1.1@26.168,44.857
NetR10_CH2_1: R10_CH2.1 U1_CH2.12 | length 2
  Top Layer 1 w0.254: U1_CH2.12@24.436,31.77 26.255,31.77 R10_CH2.1@26.418,31.607
NetR10_CH3_1: R10_CH3.1 U1_CH3.12 | length 2
  Top Layer 1 w0.254: U1_CH3.12@24.436,18.52 26.255,18.52 R10_CH3.1@26.418,18.357
NetR10_CH4_1: R10_CH4.1 U1_CH4.12 | length 2
  Top Layer 1 w0.254: U1_CH4.12@24.436,5.27 26.255,5.27 R10_CH4.1@26.418,5.107
NetR11_CH1_2: R11_CH1.2 R12_CH1.1 U2_CH1.2 | length 4.6
  Top Layer 1 w0.254: R12_CH1.1@32.877,52.727 R11_CH1.2@32.877,50.727 33.512,51.362 U2_CH1.2@35.263,51.362
NetR11_CH2_2: R11_CH2.2 R12_CH2.1 U2_CH2.2 | length 4.6
  Top Layer 1 w0.254: R12_CH2.1@33.127,39.477 R11_CH2.2@33.127,37.477 33.762,38.112 U2_CH2.2@35.513,38.112
NetR11_CH3_2: R11_CH3.2 R12_CH3.1 U2_CH3.2 | length 4.6
  Top Layer 1 w0.254: R12_CH3.1@33.127,26.227 R11_CH3.2@33.127,24.227 33.762,24.862 U2_CH3.2@35.513,24.862
NetR11_CH4_2: R11_CH4.2 R12_CH4.1 U2_CH4.2 | length 4.6
  Top Layer 1 w0.254: R12_CH4.1@33.127,12.977 R11_CH4.2@33.127,10.977 33.762,11.612 U2_CH4.2@35.513,11.612
RS485_N: DD2.7 R18.2 XP1.6 | length 20.6
  Top Layer 1 w0.254: DD2.7@52.015,24.125 52.015,24.415 52.4,24.8 52.4,25.7 R18.2@52,26.1 52.396,26.496 52.396,27.61 53.294,28.508 56.01,28.508 60.984,23.534 61.708,23.534 61.708,23.599 62.441,24.332 63.479,24.332 64.212,23.599 64.212,23.534 65.046,23.534 XP1.6@65.5,23.08 XP1.6@65.7,23.08
RS485_P: DD2.6 R18.1 XP1.5 | length 16.3
  Top Layer 1 w0.254: DD2.6@53.285,24.125 53.285,24.515 52.9,24.9 52.9,25.7 R18.1@53.3,26.1 52.904,26.496 52.904,27.4 53.504,28 55.8,28 60.72,23.08 XP1.5@62.96,23.08 XP1.5@63.16,23.08
SWCKL: DD1.38 XP1.9 | length 25.6
  Top Layer 1 w0.254: DD1.38@49.8,13.1 50.8,13.1 51,13.3 51,13.9 50.8,14.1 49.479,14.1 48.679,14.9 48.679,20.079 49.2,20.6 57.1,20.6 59.7,18 XP1.9@62.96,18 XP1.9@63.16,18
SWD: DD1.37 XP1.8 | length 27
  Top Layer 1 w0.254: DD1.37@49.8,13.6 48.7,13.6 48.3,14 48.3,20.4 49,21.1 58.4,21.1 60.1,19.4 62.329,19.4 62.441,19.288 63.479,19.288 63.591,19.4 64.36,19.4 XP1.8@65.5,20.54 ; XP1.8@65.6,20.44 XP1.8@65.7,20.54
TX_EN: DD1.33 DD2.2 DD2.3 | length 12.2
  Top Layer 1 w0.254: 49.9,17.3 49.3,17.9 49.3,19.9 49.55,20.15 51.05,20.15 52.015,19.185 DD2.2@52.015,18.675 DD2.3@53.285,18.675 ; 49.905,17.3 51.6,17.3 52.8,16.1 DD1.33@52.8,15.1
UART_RX: DD1.32 DD2.1 | length 5.3
  Top Layer 1 w0.254: DD2.1@50.745,18.675 50.745,18.25 51.297,17.698 52.452,17.698 53.3,16.85 DD1.32@53.3,15.1
UART_TX: DD1.31 DD2.4 | length 3.9
  Top Layer 1 w0.254: DD1.31@53.8,15.1 53.8,16.8 54.555,17.555 DD2.4@54.555,18.675
pads on no net: D1.3 D1.5 D1.8 D3.3 D3.5 D3.8 DD1.3 DD1.4 DD1.10 DD1.11 DD1.13 DD1.14 DD1.15 DD1.16 DD1.18 DD1.22 DD1.25 DD1.27 DD1.28 DD1.29 DD1.30 DD1.34 DD1.39 DD1.40 DD1.41 DD1.42 DD1.43 DD1.44 DD1.45 DD1.46

## Polygon pours and split planes (outlines as drawn)
+3,3В on Bottom Layer 1 "+3,3В_L04_P006" (solid, pour order 6): 69,0.5 59.5,0.5 59.5,14.5 69,14.5
AGND on Bottom Layer 1 "AGND_L04_P011" (solid, pour order 11): 0,0 69.6,0 69.6,55 0,55
+3,3В on Top Layer "+3,3В_L02_P007" (solid, pour order 7): 47.5,17.5 47.5,4 69,4 69,14.5 60,14.5 60,17.5
AGND on Top Layer "AGND_L02_P009" (solid, pour order 9): 0,0 69.6,0 69.6,55 0,55
AGND on Bottom Layer "AGND_L03_P008" (solid, pour order 8): 0,0 69.6,0 69.6,55 0,55
AGND on Top Layer 1 "AGND_L01_P010" (solid, pour order 10): 0,0 69.6,0 69.6,55 0,55